# EAGLE board OSO-MISC-21-019 Sensor Watch Test (EAGLE 9.6.2)
REV: D
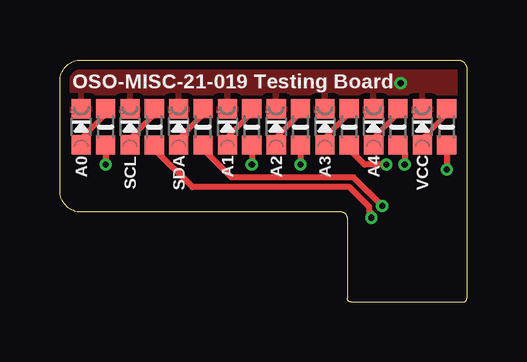
[diagram p0: board, top side]
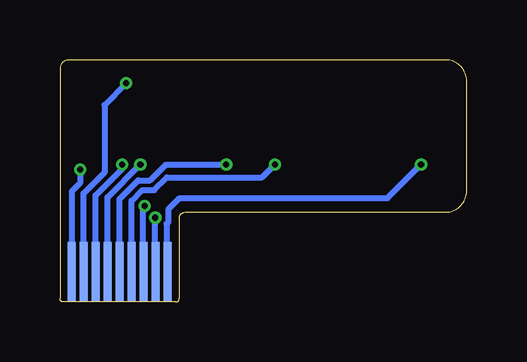
[diagram p1: board, bottom side, seen from below]

Size 16.97 x 10.1 mm. Coordinates in mm from the lower left corner, seen from the top.
Outline: 11.99,3.5 arc90 11.73,3.75 0.89,3.75 arc-90 0,4.64 0,9.21 arc-90 0.89,10.1 16.59,10.1 arc-90 16.97,9.72 16.97,3.5
Copper layers (1*16): Top 0.035559375mm / dielectric 1.6mm / Bottom 0.035559375mm
Design rules "oshpark-2layer *": minimum track width 6mil, minimum drill 10mil, track to track 6mil, track to pad 6mil, pad to pad 6mil, via to via 6mil, smd to smd 6mil, copper to edge 15mil, drill to drill 6mil, minimum pad ring 5mil, minimum via ring 5mil, stop-mask expansion 2.5mil, vias tented up to drill 12mil, thermal gap 10mil
Net classes: 0 default: width 0.203 mm; 1 power: width 0.203 mm; 2 gnd: width 0.203 mm

## Footprints (pad centres in the part's own frame; a part is rotated, then mirrored left to right if it is on the bottom)
CHIPLED_0603_NOOUTLINE = smd 0.8 x 0.8: A 0,-0.75; C 0,0.75
_0603MP = smd 0.8 x 0.8: 1 -0.762,0; 2 0.762,0
FH19C9S05SH10-FFC = smd 0.347 x 2.5 bottom: 1 2,-2.25; 2 1.5,-2.25; 3 1,-2.25; 4 0.5,-2.25; 5 0,-2.25; 6 -0.5,-2.25; 7 -1,-2.25; 8 -1.5,-2.25; 9 -2,-2.25

## Placement (x,y rotation side)
A0  RED  [CHIPLED_0603_NOOUTLINE]  0.89,7.31 0 top
A1  RED  [CHIPLED_0603_NOOUTLINE]  6.98,7.31 0 top
A2  RED  [CHIPLED_0603_NOOUTLINE]  9.02,7.31 0 top
A3  RED  [CHIPLED_0603_NOOUTLINE]  11.05,7.31 0 top
A4  RED  [CHIPLED_0603_NOOUTLINE]  13.08,7.31 0 top
R1  1K  [_0603MP]  12.06,7.31 90 top
R2  1K  [_0603MP]  10.03,7.31 90 top
R3  1K  [_0603MP]  8,7.31 90 top
R4  1K  [_0603MP]  5.97,7.31 90 top
R5  1K  [_0603MP]  3.94,7.31 90 top
R6  1K  [_0603MP]  1.9,7.31 90 top
R7  1K  [_0603MP]  14.1,7.31 90 top
R8  1K  [_0603MP]  16.13,7.31 90 top
SCL  RED  [CHIPLED_0603_NOOUTLINE]  2.92,7.31 0 top
SDA  RED  [CHIPLED_0603_NOOUTLINE]  4.95,7.31 0 top
U$3  FH19C-9S-0.5SH_10-FFC  [FH19C9S05SH10-FFC]  14.48,3.5 0 top
VCC  RED  [CHIPLED_0603_NOOUTLINE]  15.11,7.31 0 top

## Library data of the parts
A0 A1-A4 R1-R8 SCL SDA VCC = microbuilder
U$3 = FH19C-9S-0.5SH

## Nets
A0: R6.1 U$3.9
A1_SCK: R3.1 U$3.6
A2_MOSI: R2.1 U$3.5
A3_CS: R1.1 U$3.4
A4_MISO: R7.1 U$3.3
GND [gnd]: A0.C A1.C A2.C A3.C A4.C SCL.C SDA.C U$3.2 VCC.C
N$1: A4.A R7.2
N$3: A3.A R1.2
N$5: A2.A R2.2
N$7: A1.A R3.2
N$9: R4.2 SDA.A
N$11: R5.2 SCL.A
N$13: A0.A R6.2
N$15: R8.2 VCC.A
SCL: R5.1 U$3.8
SDA: R4.1 U$3.7
VCC [power]: R8.1 U$3.1

## Tracks (layer width: path | path; a pad name or v marks a point on that pad's centre or on a via)
A0  (via drill 0.25)
  Top 0.254: R6.1 v1.9,5.74
  Bottom 0.254: U$3.9 12.52,1.3 12.52,3.26 12.46,3.33 12.46,3.86 11.98,4.34 3.3,4.34 v1.9,5.74
A1_SCK  (via drill 0.25)
  Top 0.254: R3.1 v8,5.74
  Bottom 0.254: v8,5.74 8.53,5.2 12.51,5.2 13.04,4.67 13.53,4.67 13.98,4.22 U$3.6
A2_MOSI  (via drill 0.25)
  Top 0.254: R2.1 v10.03,5.74
  Bottom 0.254: v10.03,5.74 12.55,5.74 13.21,5.08 13.7,5.08 14.48,4.3 U$3.5
A3_CS  (via drill 0.25)
  Top 0.254: R1.1 12.06,6.37 12.7,5.74 v13.61,5.74
  Bottom 0.254: U$3.4 14.98,4.37 v13.61,5.74
A4_MISO  (via drill 0.25)
  Top 0.254: R7.1 14.38,6.27 v14.38,5.74
  Bottom 0.254: U$3.3 15.48,4.46 14.38,5.56 v14.38,5.74
GND  (via drill 0.25)
  Bottom 0.254: U$3.2 15.98,4.54 15.11,5.41 15.11,8.23 v14.21,9.13
  pour Top: 0,7.95 17.02,7.95 17.02,9.72 16.64,10.1 0.63,10.1 0,9.47
N$1
  Top 0.203: A4.A 13.14,6.56 13.14,6.92 14.03,7.81 14.03,8.07 R7.2
N$3
  Top 0.203: A3.A 11.1,6.56 11.1,6.92 11.99,7.81 11.99,8.07 R1.2
N$5
  Top 0.203: R2.2 10.03,7.89 9.05,6.92 9.05,6.56 A2.A
N$7
  Top 0.203: A1.A 7.01,6.56 7.01,6.92 7.99,7.89 R3.2
N$9
  Top 0.203: SDA.A 4.97,6.56 4.97,6.83 5.94,7.81 5.94,8.07 R4.2
N$11
  Top 0.203: SCL.A 2.92,6.83 3.9,7.81 3.9,8.07 R5.2
N$13
  Top 0.203: A0.A 0.96,6.56 0.96,6.92 1.85,7.81 1.85,8.07 R6.2
N$15
  Top 0.203: VCC.A 15.19,6.56 15.19,6.92 16.08,7.81 16.08,8.07 R8.2
SCL  (via drill 0.25)
  Top 0.254: v12.99,3.52 12.99,3.71 12.9,3.8 12.9,3.97 12.08,4.79 5.52,4.79 3.94,6.38 R5.1
  Bottom 0.254: U$3.8 13.02,1.3 13.02,3.49 v12.99,3.52
SDA  (via drill 0.25)
  Top 0.254: v13.44,4.01 12.24,5.2 7.15,5.2 5.97,6.38 R4.1
  Bottom 0.254: U$3.7 13.53,1.3 13.53,3.92 v13.44,4.01
VCC  (via drill 0.25)
  Top 0.254: R8.1 v16.13,5.53
  Bottom 0.254: v16.13,5.53 16.13,4.96 16.46,4.63 16.46,1.25 U$3.1

## Text on the board
tPlace: OSO-MISC-21-019 Testing Board